# Altium PCB PCB1.PcbDoc (part 3 of 3)
Units mm, origin at the board's own origin, x right, y up, seen from the top; angles counter-clockwise.
Board outline 130 x 100 mm, 2 copper layers (Top Layer, Bottom Layer), stack 1.571 mm thick; 286 components, 215 nets, 1030 pads, 857 vias.
Unrouted connection lines stored in the file: 4.
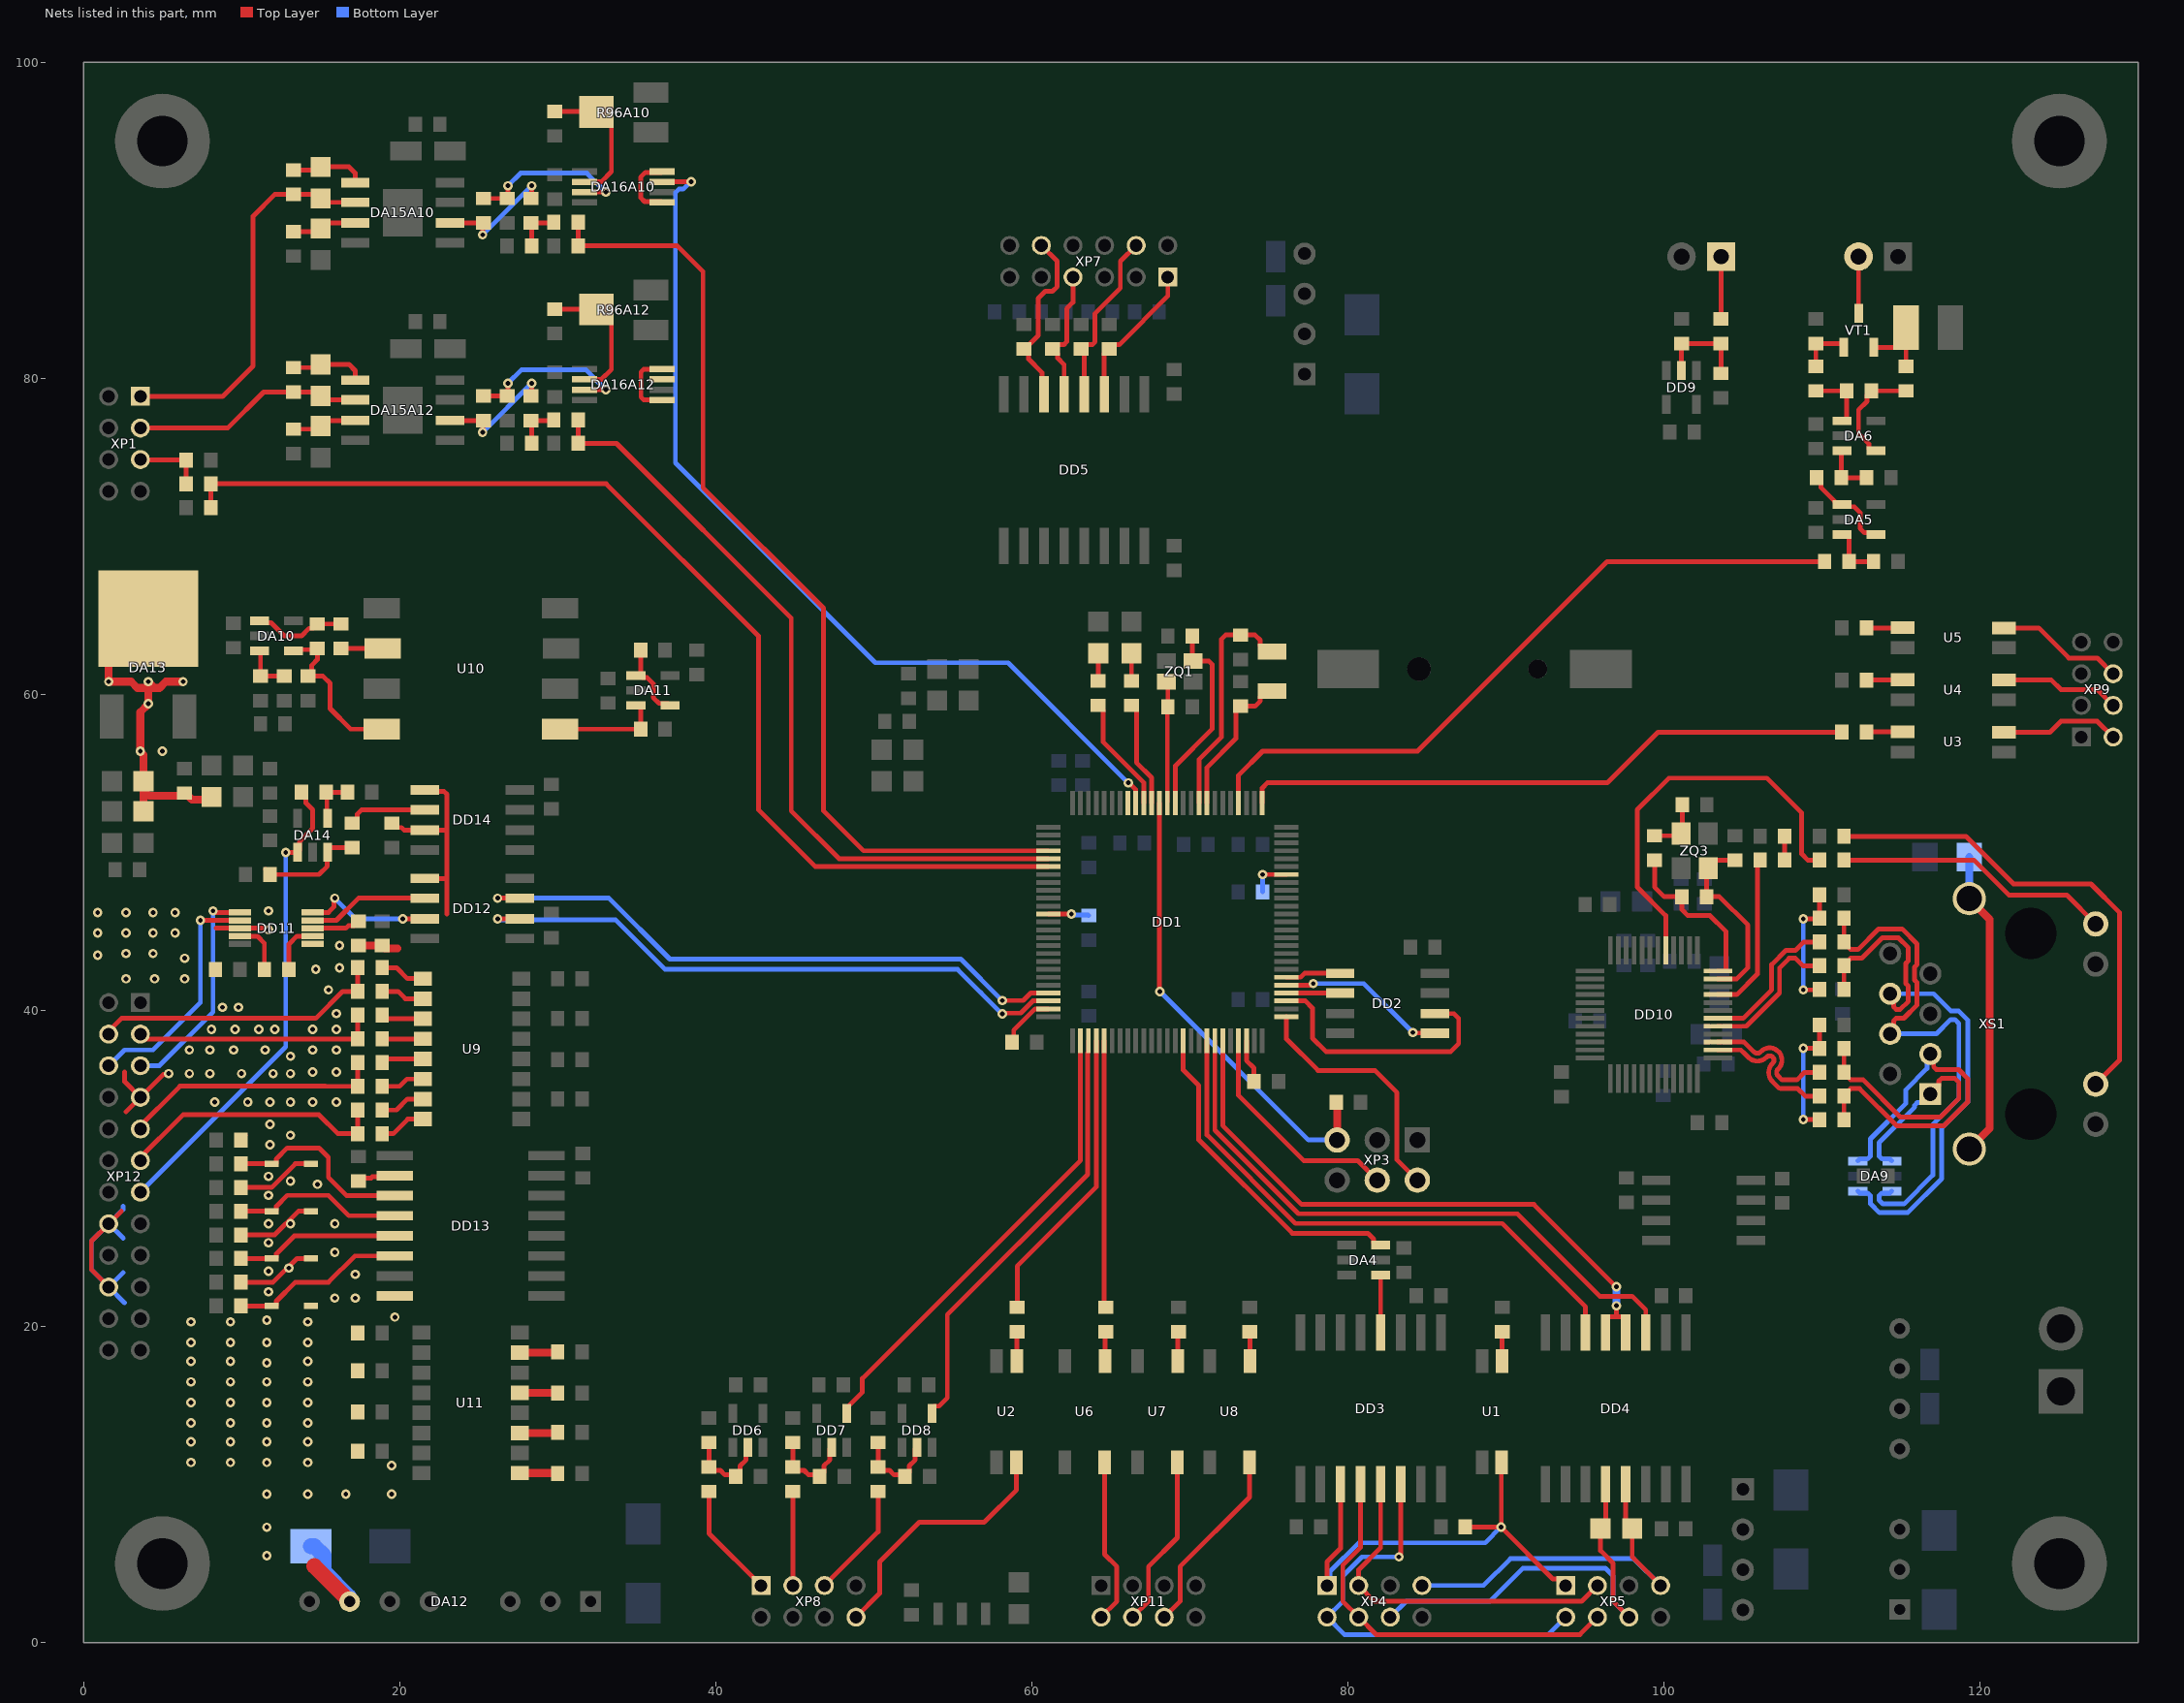
[diagram p3: the nets of this part, all layers, seen from the top]

## Via types
v1: diameter 0.6, hole 0.3, Top Layer to Bottom Layer, tented both sides, 832 vias
v2: diameter 0.6, hole 0.3, Top Layer to Bottom Layer, 25 vias

## Nets (pads, with @x,y where several pads share a name; then routed paths per layer and width w, separated by ;. In a path a pad name is that pad's centre, name@x,y a point inside that pad or via, vN(x,y) a via of type N, cw(c..) or ccw(c..) an arc to the next point about the centre after c; other vN are vias at no path point) (continued)
GND_HW: C69.2 C70.2 C74.2 C75.2 C82.1 C83.2 C84.2 C85.2 DA12.7 DA13.2 DD11.1 DD11.8 DD12.5 DD13.2 DD13.8 DD14.5 DD14.7 R51.1 R52.1 R54.1 R55.1 R57.1 R58.1 R59.1 R61.1 R83.1 R85.1 R86.1 R87.1 R89.1 R90.1 U9.2 U9.4 U9.6 U9.8 VD3.2 VD4.2 VD5.2 VD6.2 XP12.7 XP12.16 XP12.20 | length 103
  Top Layer w0.3: XP12.20@1.6,22.5 0.5,23.6 0.5,25.4 XP12.16@1.6,26.5 2.4,27.3 ; 2.6,36.1 2.6,35.5 XP12.7@3.6,34.5 ; 2.7,33.6 XP12.7@3.6,34.5 ; v1(5.4,36) 5.343,35.943 5.043,35.943 XP12.7@3.6,34.5 ; 8.4,45.2 DD11.8@9.9,45.2 11.519,45.2 11.619,45.1 v1(11.7,45.1) ; R61.1@9.95,22.8 12,22.8 13.5,24.3 VD4.2@14.4,24.3 ; R58.1@9.95,25.8 12.1,25.8 13.6,27.3 VD5.2@14.4,27.3 ; R55.1@9.95,28.8 11.9,28.8 13.4,30.3 VD6.2@14.4,30.3 ; R52.1@9.95,31.8 9.95,31.825 R52.1@10.225,32.1 ; C75.2@17.4,29.2 17.6,29.4 18.2,29.4 18.282,29.482 19.632,29.482 DD13.2@19.7,29.55 ; R59.1@18.9,32.2 19.6,32.2 20.52,33.12 U9.8@21.48,33.12 ; R57.1@18.9,35.2 20,35.2 20.46,35.66 U9.6@21.48,35.66 ; R54.1@18.9,38.2 U9.4@21.48,38.2 ; R51.1@18.9,41.2 19.9,41.2 20.36,40.74 U9.2@21.48,40.74 ; C83.2@19.5,51.85 19.775,51.575 20.125,51.575 20.3,51.4 DD14.7@21.6,51.4 23,51.4 ; DD12.5@21.6,48.35 23,48.35 ; DD14.5@21.6,53.95 21.7,53.85 22.824,53.85 23,53.674 23,51.4 ; 23,46.1 23,48.35 ; 23,48.35 23,51.4
  Top Layer w0.5: R85.1@3.8,52.6 C82.1@3.8,53.898 ; DA13.2@4.1,64.8 1.6,62.3 v1(1.6,60.8) 3.014,60.8 3.414,60.4 4.1,60.4 ; v1(6.3,60.8) 5.2,60.8 4.8,60.4 4.5,60.4 ; R83.1@8.1,53.5 7.94,53.34 6.86,53.34 6.45,53.75 C84.2@6.4,53.75 6.24,53.59 4.161,53.59 4.146,53.605 4.093,53.605 C82.1@3.8,53.898 ; C70.2@17.401,44.1 C74.2@18.9,44.1 ; C74.2@18.9,44.1 19.075,43.925 19.875,43.925 ; C82.1@3.8,53.898 C82.1@3.8,54.5 3.8,56.173 3.6,56.373 v1(3.6,56.4) 3.6,58.873 4.1,59.373 v1(4.1,59.4) 4.1,60.4 ; 4.1,60.4 4.5,60.4 ; 4.1,60.4 v1(4.1,60.8) 4.5,60.4
  Top Layer w1: 14.6,4.84 DA12.7@16.84,2.6
  Bottom Layer w0.3: 2.5,23.4 XP12.20@1.6,22.5 ; 2.5,27.6 2.5,27.4 XP12.16@1.6,26.5 ; 2.514,25.586 XP12.16@1.6,26.5 ; 2.6,21.5 XP12.20@1.6,22.5 ; XP12.20@1.6,22.5 0.5,23.6 0.5,25.4 XP12.16@1.6,26.5
  Bottom Layer w1: C85.2@14.4,6.1 14.6,6.1 15.2,5.5 15.2,4.5 16.783,2.917 16.783,2.657 DA12.7@16.84,2.6
  other v1: 11.6,5.5 11.6,7.3 11.6,9.4 14.2,9.4 16.6,9.4 19.5,9.4 19.5,11.2 6.8,11.4 9.3,11.4 11.6,11.4 14.2,11.4 6.8,12.7 9.3,12.7 11.6,12.7 14.2,12.7 6.8,13.9 9.3,13.9 11.6,13.9 14.2,13.9 6.8,15.2 9.3,15.2 11.6,15.2 14.2,15.2 6.8,16.5 9.3,16.5 11.6,16.5 14.2,16.5 11.6,17.7 6.8,17.8 9.3,17.8 14.2,17.8 6.8,19 9.3,19 11.6,19 14.2,19 6.8,20.3 9.3,20.3 14.2,20.3 11.6,20.4 19.7,20.6 15.9,21.8 17.2,21.8 11.7,22.2 17.2,23.3 11.7,23.5 13,23.7 15.9,24.7 11.7,25.3 11.7,26.5 13.1,26.5 15.9,26.5 11.7,28.3 14.8,29 13.1,29.2 11.7,29.5 11.8,31.5 13.1,32.1 11.8,32.8 8.3,34.2 10.4,34.2 11.8,34.2 13.1,34.2 14.5,34.2 16,34.2 6.7,36 8,36 10,36 12,36 13.1,36 14.5,36.1 16,36.1 13.1,37.1 6.7,37.5 8,37.5 9.5,37.5 11.5,37.5 14.5,37.5 16,37.5 8.1,38.8 9.6,38.8 11.1,38.8 12.1,38.8 14.5,38.8 16,38.8 16,39.8 8.8,40.2 9.8,40.2 15.5,41.3 2.7,42 4.5,42 6.4,42 14.7,42.6 16.2,42.7 6.4,43.3 0.9,43.5 2.7,43.6 4.4,43.6 16.2,44.1 0.9,44.9 2.7,44.9 4.4,44.9 5.8,44.9 0.9,46.2 2.7,46.2 4.4,46.2 5.8,46.2 11.7,46.3 5,56.4
GUIDE_LAS: DD1.4 R10.1 | length 44.4
  Top Layer w0.3: DD1.4@73.075,53.125 73.075,54.875 74.6,56.4 84.4,56.4 96.4,68.4 R10.1@110.15,68.4
IL1_HW: R51.2 R64.1 XP12.4 | length 18.6
  Top Layer w0.3: XP12.4@1.4,38.5 2.4,39.5 14.7,39.5 16.4,41.2 R51.2@17.35,41.2 R64.1@17.35,42.7
IL2_HW: R54.2 R65.1 XP12.3 | length 15.6
  Top Layer w0.3: XP12.3@3.4,38.5 3.644,38.5 3.944,38.2 R54.2@17.35,38.2 R65.1@17.35,39.7
KEY: DD1.52 DD7.4 | length 29.7
  Top Layer w0.3: DD7.4@48.275,14.515 48.275,14.84 49.275,15.84 49.275,16.715 63.075,30.515 DD1.52@63.075,38.075
KEY_HW: R57.2 R66.1 XP12.9 | length 16.6
  Top Layer w0.3: XP12.9@3.4,32.5 6.107,35.207 15.307,35.207 15.313,35.2 R57.2@17.35,35.2 R66.1@17.35,36.7
LED1: DD1.15 R5.1 | length 6.7
  Top Layer w0.3: R5.1@66.3,59.3 66.343,59.3 66.618,59.025 66.618,55.682 67.575,54.725 DD1.15@67.575,53.125
LED2: DD1.16 R6.1 | length 7.4
  Top Layer w0.3: R6.1@64.2,59.3 64.243,59.3 64.518,59.025 64.518,56.982 67.075,54.425 DD1.16@67.075,53.125
LNKn: DD10.17 R45.2 | length 25.7
  Top Layer w0.3: DD10.17@100.1,43.8 100.1,46 98.3,47.8 98.3,52.7 100.3,54.7 106.5,54.7 108.7,52.5 108.7,49.9 109.088,49.512 R45.2@109.825,49.512
MEM_CS: DD1.81 DD2.1 | length 3.5
  Top Layer w0.3: DD1.81@76.1,42.1 77,42.1 77.25,42.35 DD2.1@79.5,42.35
MEM_MISO: DD1.79 DD2.2 | length 4
  Top Layer w0.3: DD1.79@75.5,41.1 DD2.2@79.5,41.1
MEM_MOSI: DD1.80 DD2.5 | length 11.2
  Top Layer w0.3: DD1.80@75.5,41.6 DD1.80@76.1,41.6 77.619,41.6 77.719,41.7 v1(77.8,41.7) ; v1(84.1,38.6) 84.125,38.575 85.375,38.575 DD2.5@85.4,38.6
  Bottom Layer w0.3: v1(77.8,41.7) 81,41.7 v1(84.1,38.6)
MEM_SCLK: DD1.78 DD2.6 | length 16.8
  Top Layer w0.3: DD1.78@76.1,40.6 77.3,40.6 77.75,40.15 77.75,38.25 78.6,37.4 86.5,37.4 87,37.9 87,39.5 86.7,39.8 DD2.6@85.5,39.8
MP_EN_HW: R59.2 R67.1 XP12.11 | length 17.1
  Top Layer w0.3: XP12.11@3.4,30.5 6.3,33.4 14.9,33.4 16.1,32.2 R59.2@17.35,32.2 R67.1@17.35,33.7
NetC12_1: C12.1 DD1.49 | length 3.6
  Top Layer w0.3: C12.1@58.75,38 58.85,38.1 58.85,38.749 60.201,40.1 DD1.49@61.05,40.1
NetC14_1: C14.1 DD1.73 | length 2.8
  Top Layer w0.3: DD1.73@73.575,38.075 73.575,36.825 74.05,36.35 C14.1@74.05,35.5
NetC30_1: C30.1 DA5.3 R10.2 | length 3.6
  Top Layer w0.3: DA5.3@111.25,70.1 111.575,70.1 111.7,69.975 111.7,69.35 R10.2@111.7,68.4 C30.1@113.25,68.4
NetC33_1: C33.1 DA6.1 R13.1 | length 4.1
  Top Layer w0.3: R13.1@109.6,79.2 C33.1@111.55,79.2 111.55,77.425 111.425,77.3 DA6.1@111.25,77.3
NetC33_2: C33.2 DA6.4 R14.1 | length 7
  Top Layer w0.3: DA6.4@113.4,75.4 113.075,75.4 112.95,75.525 112.95,75.85 112.3,76.5 112.3,78 112.832,78.532 112.832,78.932 C33.2@113.1,79.2 R14.1@115.3,79.2
NetC44_1: C44.1 DD6.2 R21.2 R24.1 | length 5.7
  Top Layer w0.3: R24.1@39.575,12.665 R21.2@39.575,11.115 39.793,10.897 40.293,10.897 40.576,10.614 41.176,10.614 C44.1@41.275,10.515 41.543,10.783 41.543,11.183 41.919,11.559 41.919,12.259 DD6.2@42.025,12.365
NetC45_1: C45.1 DD7.2 R22.2 R25.1 | length 5.7
  Top Layer w0.3: R25.1@44.875,12.665 R22.2@44.875,11.115 45.093,10.897 45.593,10.897 45.876,10.614 46.476,10.614 C45.1@46.575,10.515 46.843,10.783 46.843,11.183 47.219,11.559 47.219,12.259 DD7.2@47.325,12.365
NetC46_1: C46.1 DD8.2 R23.2 R26.1 | length 5.7
  Top Layer w0.3: R26.1@50.275,12.665 R23.2@50.275,11.115 50.493,10.897 50.993,10.897 51.276,10.614 51.876,10.614 C46.1@51.975,10.515 52.243,10.783 52.243,11.183 52.619,11.559 52.619,12.259 DD8.2@52.725,12.365
NetC50_1: C50.1 DD9.2 R31.2 R32.1 | length 6.1
  Top Layer w0.3: DD9.2@101.1,80.5 C50.1@101.1,82.2 R31.2@103.6,82.2 R32.1@103.6,80.3
NetC53_1: C53.1 XS1.13 XS1.14 | length 19.5
  Top Layer w0.5: XS1.13@119.3,31.232 120.6,32.532 120.6,45.772 XS1.14@119.3,47.072
  Bottom Layer w0.5: XS1.14@119.3,47.072 C53.1@119.3,49.7
NetC55_1: C55.1 R36.2 R37.2 | length 8.1
  Top Layer w0.3: v1(108.8,33.1) 109.803,33.1 R36.2@109.825,33.078 ; v1(108.8,37.6) 109.803,37.6 R37.2@109.825,37.578 C55.1@109.825,39.078
  Bottom Layer w0.3: v1(108.8,33.1) v1(108.8,37.6)
NetC56_1: C56.1 R38.2 R39.2 | length 8.1
  Top Layer w0.3: v1(108.8,41.3) 109.8,41.3 R38.2@109.825,41.325 ; v1(108.8,45.8) 109.8,45.8 R39.2@109.825,45.825 C56.1@109.825,47.325
  Bottom Layer w0.3: v1(108.8,41.3) v1(108.8,45.8)
NetC60_1: C60.1 R49.2 ZQ3.3 | length 3.6
  Top Layer w0.3: R49.2@99.4,51.05 100.925,51.05 ZQ3.3@101.075,51.2 101.15,51.275 C60.1@101.15,53
NetC70_1: C70.1 DD11.3 | length 3.1
  Top Layer w0.3: DD11.3@14.5,45.2 16.6,45.2 16.776,45.376 17.126,45.376 C70.1@17.401,45.651
NetC72_1: C72.1 DD11.9 | length 3.4
  Top Layer w0.3: DD11.9@9.9,44.7 11,44.7 11.45,44.25 C72.1@11.45,42.6
NetC72_2: C72.2 DD11.2 | length 3.3
  Top Layer w0.3: C72.2@13,42.6 13,44.2 13.5,44.7 DD11.2@14.5,44.7
NetC73_1: C73.1 DA10.1 R70.1 | length 5.9
  Top Layer w0.3: DA10.1@11.15,64.65 11.275,64.525 11.875,64.525 12.7,63.7 13.8,63.7 14.275,64.175 14.525,64.175 C73.1@14.8,64.45 R70.1@16.3,64.45
NetC73_2: C73.2 DA10.4 R72.1 U10.4 | length 10.6
  Top Layer w0.3: DA10.4@13.3,62.75 13.375,62.825 14.725,62.825 C73.2@14.8,62.9 14.8,62.2 14.443,61.843 14.443,61.393 R72.1@14.2,61.15 15.15,61.15 15.6,60.7 15.6,59.1 16.9,57.8 U10.4@18.875,57.8
NetC86_1: C86.1 DA14.3 R82.2 | length 6.9
  Top Layer w0.3: C86.1@11.525,48.925 11.8,48.65 C86.1@11.8,48.6 14.9,48.6 15.426,49.126 15.426,50.151 15.575,50.3 R82.2@17,50.3
NetC90A10_2: C90A10.2 DA15A10.3 R91A10.1 | length 3.4
  Top Layer w0.3: C90A10.2@13.3,89.275 R91A10.1@14.8,89.275 ; R91A10.1@15.35,89.825 DA15A10.3@17.2,89.825
NetC90A12_2: C90A12.2 DA15A12.3 R91A12.1 | length 4.1
  Top Layer w0.3: C90A12.2@13.3,76.775 14.8,76.775 R91A12.1@15,76.975 15.35,77.325 DA15A12.3@17.2,77.325
NetC91A10_1: C91A10.1 DA15A10.1 R92A10.1 | length 4.5
  Top Layer w0.3: C91A10.1@13.3,93.175 R92A10.1@14.8,93.175 ; R92A10.1@15,93.375 16.8,93.375 17.2,92.975 DA15A10.1@17.2,92.375
NetC91A12_1: C91A12.1 DA15A12.1 R92A12.1 | length 4.7
  Top Layer w0.3: C91A12.1@13.3,80.675 14.8,80.675 R92A12.1@15,80.875 16.8,80.875 17.2,80.475 DA15A12.1@17.2,79.875
NetC94A10_1: C94A10.1 DA16A10.3 R93A10.2 | length 10.7
  Top Layer w0.3: R93A10.2@25.3,91.375 C94A10.1@26.8,91.375 26.85,91.425 v1(26.85,92.175) ; DA16A10.3@31.7,91.775 v1(33.05,91.775)
  Bottom Layer w0.3: v1(26.85,92.175) 27.65,92.975 31.85,92.975 v1(33.05,91.775)
NetC94A12_1: C94A12.1 DA16A12.3 R93A12.2 | length 10.7
  Top Layer w0.3: R93A12.2@25.3,78.875 C94A12.1@26.8,78.875 26.85,78.925 v1(26.85,79.675) ; DA16A12.3@31.7,79.275 v1(33.05,79.275)
  Bottom Layer w0.3: v1(26.85,79.675) 27.7,80.525 31.8,80.525 v1(33.05,79.275)
NetDA4_4: DA4.4 DD3.4 | length 3.7
  Top Layer w0.3: DD3.4@82.065,19.615 82.065,23.125 82.19,23.25 DA4.4@82.25,23.25
NetDA5_1: DA5.1 DA5.4 R11.1 | length 6.1
  Top Layer w0.3: R11.1@109.65,73.7 109.925,73.425 109.925,73.075 110.8,72.2 110.8,72.125 110.925,72 DA5.1@111.25,72 111.375,71.875 112.025,71.875 112.4,71.5 112.4,70.5 112.675,70.225 113.275,70.225 DA5.4@113.4,70.1
NetDA6_3: DA6.3 R11.2 R12.1 | length 3.3
  Top Layer w0.3: R11.2@111.183,73.7 R12.1@112.783,73.7 ; R11.2@111.2,73.7 111.2,75.35 DA6.3@111.25,75.4
NetDA10_3: DA10.3 R56.2 R60.1 | length 3.1
  Top Layer w0.3: DA10.3@11.15,62.75 11.2,62.7 R56.2@11.2,61.15 R60.1@12.7,61.15
NetDA11_1: DA11.1 DA11.4 R77.1 | length 5
  Top Layer w0.3: DA11.1@34.95,61.2 DA11.1@35.275,61.2 ; DA11.1@35.25,61.2 35.375,61.075 35.65,61.075 36.046,60.68 36.046,59.798 36.419,59.425 36.975,59.425 DA11.4@37.1,59.3 ; DA11.1@35.25,61.325 R77.1@35.25,62.8
NetDA11_3: DA11.3 R76.1 U10.5 | length 6.8
  Top Layer w0.3: U10.5@30.15,57.8 R76.1@35.25,57.8 35.25,59.175 35.125,59.3 DA11.3@34.95,59.3
NetDA14_4: DA14.4 R84.2 R88.1 | length 3
  Top Layer w0.3: DA14.4@15.45,52.15 15.4,52.2 15.4,53.75 R88.1@15.35,53.8 R84.2@16.7,53.8
NetDA15A10_6: DA15A10.6 R93A10.1 R94A10.1 | length 8.1
  Top Layer w0.3: DA15A10.6@23.2,89.825 R93A10.1@25.3,89.825 25.25,89.775 v1(25.25,89.075) ; R94A10.1@28.3,91.375 28.35,91.425 v1(28.35,92.175)
  Bottom Layer w0.3: v1(25.25,89.075) v1(28.35,92.175)
NetDA15A12_6: DA15A12.6 R93A12.1 R94A12.1 | length 8.1
  Top Layer w0.3: DA15A12.6@23.2,77.325 R93A12.1@25.3,77.325 25.25,77.275 v1(25.25,76.575) ; R94A12.1@28.3,78.875 28.35,78.925 v1(28.35,79.675)
  Bottom Layer w0.3: v1(25.25,76.575) v1(28.35,79.675)
NetDA16A10_2: DA16A10.2 R95A10.2 R96A10.2 | length 8.9
  Top Layer w0.3: R95A10.2@29.8,96.875 32.425,96.875 R96A10.2@32.45,96.85 32.55,96.85 33.4,96 33.4,93.075 32.75,92.425 DA16A10.2@31.7,92.425
NetDA16A10_5: DA16A10.5 DA16A10.8 | length 4.3
  Top Layer w0.3: DA16A10.5@36.6,91.125 36.55,91.175 35.5,91.175 35.249,91.426 35.249,92.724 35.55,93.025 36.55,93.025 DA16A10.8@36.6,93.075
NetDA16A12_2: DA16A12.2 R95A12.2 R96A12.2 | length 8.9
  Top Layer w0.3: R95A12.2@29.8,84.375 32.425,84.375 R96A12.2@32.45,84.35 32.55,84.35 33.4,83.5 33.4,80.55 32.775,79.925 DA16A12.2@31.7,79.925
NetDA16A12_5: DA16A12.5 DA16A12.8 | length 4.4
  Top Layer w0.3: DA16A12.5@36.6,78.625 35.451,78.625 35.275,78.801 35.275,80.399 35.451,80.575 DA16A12.8@36.6,80.575
NetDD1_37: DD1.37 R3.1 | length 2.6
  Top Layer w0.3: DD1.37@61.05,46.1 v1(62.5,46.1)
  Bottom Layer w0.3: v1(62.5,46.1) 62.55,46.05 63.55,46.05 R3.1@63.6,46
NetDD1_94: DD1.94 R4.1 | length 2.6
  Top Layer w0.3: v1(74.6,48.6) DD1.94@76.1,48.6
  Bottom Layer w0.3: R4.1@74.6,47.5 v1(74.6,48.6)
NetDD3_11: DD3.11 R7.2 U1.4 XP4.1 XP5.1 | length 31.7
  Top Layer w0.3: XP4.1@78.675,3.615 78.675,5.115 79.525,5.965 DD3.11@79.525,10.015 ; R7.2@87.5,7.14 87.675,7.315 v1(89.675,7.315) ; U1.4@89.725,11.415 89.7,11.39 89.7,7.34 v1(89.675,7.315) ; XP5.1@93.775,3.615 93.357,4.033 92.957,4.033 v1(89.675,7.315)
  Bottom Layer w0.3: XP4.1@78.675,3.615 78.849,3.789 78.849,4.489 80.675,6.315 88.675,6.315 v1(89.675,7.315)
NetDD3_12: DD3.12 XP4.4 XP5.4 | length 25.3
  Top Layer w0.3: DD3.12@80.795,10.015 80.795,6.035 79.675,4.915 79.675,2.615 XP4.4@80.675,1.615 81.775,0.515 94.675,0.515 XP5.4@95.775,1.615
NetDD3_13: DD3.13 XP4.3 XP5.3 | length 22.9
  Top Layer w0.3: DD3.13@82.065,10.015 82.065,6.005 80.675,4.615 XP4.3@80.675,3.615 81.675,2.615 94.775,2.615 XP5.3@95.775,3.615
NetDD3_14: DD3.14 XP4.2 XP5.2 | length 27.7
  Top Layer w0.3: v1(83.225,5.425) 83.225,5.507 83.335,5.617 DD3.14@83.335,10.015
  Bottom Layer w0.3: v1(83.225,5.425) 80.885,5.425 79.675,4.215 79.675,2.615 XP4.2@78.675,1.615 79.775,0.515 92.675,0.515 XP5.2@93.775,1.615
NetDD4_12: DD4.12 R8.1 XP4.6 XP5.6 | length 27.9
  Top Layer w0.3: DD4.12@96.295,10.015 96.295,7.535 R8.1@95.975,7.215 95.975,5.815 96.775,5.015 96.775,2.615 XP5.6@97.775,1.615
  Bottom Layer w0.3: XP4.6@82.675,1.615 83.675,2.615 88.975,2.615 91.075,4.715 96.275,4.715 96.775,4.215 96.775,2.615 XP5.6@97.775,1.615
NetDD4_13: DD4.13 R8.2 XP4.7 XP5.7 | length 23.8
  Top Layer w0.3: DD4.13@97.565,10.015 97.565,7.625 R8.2@97.975,7.215 97.975,5.415 XP5.7@99.775,3.615
  Bottom Layer w0.3: XP4.7@84.675,3.615 88.575,3.615 90.275,5.315 98.075,5.315 XP5.7@99.775,3.615
NetDD5_3: DD5.3 R20.1 XP7.1 | length 9.3
  Top Layer w0.3: DD5.3@64.58,79 64.58,81.575 64.855,81.85 R20.1@64.9,81.85 65.175,82.125 65.525,82.125 68.6,85.2 XP7.1@68.6,86.4
NetDD5_4: DD5.4 R19.1 XP7.4 | length 11.2
  Top Layer w0.3: DD5.4@63.31,79 63.31,81.64 R19.1@63.1,81.85 63.375,82.125 63.824,82.125 64,82.301 64,84.1 65.6,85.7 65.6,87.4 XP7.4@66.6,88.4
NetDD5_5: DD5.5 R18.1 XP7.7 | length 8.5
  Top Layer w0.3: DD5.5@62.04,79 62.04,80.86 61.625,81.275 61.625,81.575 61.35,81.85 R18.1@61.3,81.85 61.575,82.125 62.024,82.125 62.2,82.301 62.2,84.4 62.6,84.8 XP7.7@62.6,86.4
NetDD5_6: DD5.6 R17.1 XP7.10 | length 11.5
  Top Layer w0.3: R17.1@59.5,81.85 R17.1@59.518,81.85 ; XP7.10@60.6,88.4 61.6,87.4 61.6,85.8 61.3,85.5 60.851,85.5 60.4,85.049 60.4,82.7 59.55,81.85 R17.1@59.518,81.85 ; DD5.6@60.77,79 60.642,79.128 60.642,80.358 59.793,81.207 59.793,81.575 R17.1@59.518,81.85
NetDD10_9: DD10.9 R48.2 | length 10.3
  Top Layer w0.3: DD10.9@103.4,41 104.6,41 105.9,42.3 105.9,49.337 R48.2@106.075,49.512
NetDD11_4: DD11.4 DD12.6 | length 7.7
  Top Layer w0.3: DD11.4@14.5,45.7 16,45.7 17.4,47.1 DD12.6@21.6,47.1
NetDD11_5: DD11.5 DD12.7 | length 8.3
  Top Layer w0.3: DD11.5@14.5,46.2 15.5,46.2 15.843,46.543 15.843,47.043 v1(15.9,47.1) ; v1(20.2,45.8) DD12.7@21.6,45.8
  Bottom Layer w0.3: v1(15.9,47.1) 17.2,45.8 v1(20.2,45.8)
NetDD13_3: DD13.3 R68.2 VD6.1 | length 12.3
  Top Layer w0.3: R68.2@9.95,30.3 VD6.1@11.9,30.3 12.15,30.3 12.2,30.35 12.2,30.6 12.9,31.3 14.9,31.3 15.494,30.706 15.494,29.438 16.652,28.28 DD13.3@19.7,28.28
NetDD13_4: DD13.4 R62.2 VD5.1 | length 10.8
  Top Layer w0.3: R62.2@9.95,27.3 VD5.1@11.9,27.3 12.15,27.3 12.2,27.35 12.2,27.6 12.9,28.3 15.5,28.3 16.79,27.01 DD13.4@19.7,27.01
NetDD13_5: DD13.5 R69.2 VD4.1 | length 10.5
  Top Layer w0.3: R69.2@9.95,24.3 VD4.1@11.9,24.3 12.15,24.3 12.2,24.35 12.2,24.6 13.34,25.74 DD13.5@19.7,25.74
NetDD13_6: DD13.6 R63.2 VD3.1 | length 11.2
  Top Layer w0.3: R63.2@9.95,21.3 VD3.1@11.9,21.3 12.15,21.3 12.2,21.35 12.2,21.6 13.4,22.8 15.5,22.8 17.17,24.47 DD13.6@19.7,24.47
NetDD14_6: DD14.6 R82.1 | length 5.1
  Top Layer w0.3: R82.1@17,51.85 17.05,51.85 17.325,52.125 17.325,52.425 17.6,52.7 DD14.6@21.6,52.7
NetR5_2: R5.2 VD1.1 | length 1.8
  Top Layer w0.3: R5.2@66.3,60.85 VD1.1@66.3,62.6
NetR6_2: R6.2 VD2.1 | length 1.8
  Top Layer w0.3: R6.2@64.2,60.85 VD2.1@64.2,62.6
NetR9_2: R9.2 U1.1 | length 1.9
  Top Layer w0.3: U1.1@89.75,17.815 89.75,19.64 R9.2@89.775,19.665
NetR13_2: R13.2 R15.2 VT1.1 | length 3.4
  Top Layer w0.3: R13.2@109.6,80.75 R15.2@109.6,82.2 111.225,82.2 111.35,82.075 VT1.1@111.35,81.95
NetR14_2: R14.2 R16.2 VT1.2 | length 4.8
  Top Layer w0.3: VT1.2@113.25,81.95 114.65,81.95 R16.2@115.3,82.6 ; R14.2@115.3,80.75 R16.2@115.3,83.2
NetR21_1: R21.1 XP8.1 | length 7.3
  Top Layer w0.3: R21.1@39.575,9.565 39.575,6.915 XP8.1@42.875,3.615
NetR22_1: R22.1 XP8.3 | length 5.9
  Top Layer w0.3: XP8.3@44.875,3.615 R22.1@44.875,9.565
NetR23_1: R23.1 XP8.5 | length 7.4
  Top Layer w0.3: XP8.5@46.875,3.615 50.275,7.015 R23.1@50.275,9.565
NetR27_1: R27.1 U2.1 | length 1.9
  Top Layer w0.3: U2.1@59.05,17.815 59.05,19.64 R27.1@59.075,19.665
NetR28_1: R28.1 U3.1 | length 2.6
  Top Layer w0.3: R28.1@112.55,57.6 112.575,57.625 U3.1@115.1,57.625
NetR29_1: R29.1 U4.1 | length 2.3
  Top Layer w0.3: R29.1@112.8,60.9 115.075,60.9 U4.1@115.1,60.925
NetR30_1: R30.1 U5.1 | length 2.3
  Top Layer w0.3: R30.1@112.8,64.2 115.075,64.2 U5.1@115.1,64.225
NetR31_1: R31.1 XP10.1 | length 3.9
  Top Layer w0.3: R31.1@103.6,83.75 XP10.1@103.6,87.7
NetR33_1: R33.1 U6.1 | length 1.9
  Top Layer w0.3: U6.1@64.625,17.815 64.625,19.615 R33.1@64.675,19.665
NetR34_1: R34.1 U7.1 | length 1.9
  Top Layer w0.3: U7.1@69.225,17.815 69.225,19.615 R34.1@69.275,19.665
NetR35_1: R35.1 U8.1 | length 1.9
  Top Layer w0.3: R35.1@73.775,19.665 73.8,19.64 U8.1@73.8,17.815
NetR42_1: R42.1 XS1.10 | length 30.9
  Top Layer w0.3: R42.1@111.375,51.012 119.088,51.012 122.1,48 127,48 128.8,46.2 128.8,36.84 XS1.10@127.3,35.339
NetR45_1: R45.1 XS1.12 | length 17.6
  Top Layer w0.3: R45.1@111.375,49.512 119.588,49.512 121.8,47.3 125.469,47.3 XS1.12@127.3,45.469
NetR46_2: R46.2 R48.1 | length 1.5
  Top Layer w0.3: R48.1@107.625,49.512 R46.2@107.625,51.012
NetR64_2: R64.2 U9.1 | length 2.9
  Top Layer w0.3: R64.2@18.9,42.7 19.8,42.7 20.49,42.01 U9.1@21.48,42.01
NetR65_2: R65.2 U9.3 | length 2.7
  Top Layer w0.3: R65.2@18.9,39.7 19.13,39.47 U9.3@21.48,39.47
NetR66_2: R66.2 U9.5 | length 2.7
  Top Layer w0.3: R66.2@18.9,36.7 19.13,36.93 U9.5@21.48,36.93
NetR67_2: R67.2 U9.7 | length 2.9
  Top Layer w0.3: R67.2@18.9,33.7 19.8,33.7 20.49,34.39 U9.7@21.48,34.39
NetR70_2: R70.2 U10.2 | length 2.6
  Top Layer w0.3: R70.2@16.3,62.9 U10.2@18.925,62.9
NetR78_1: R78.1 U11.1 | length 2
  Top Layer w0.3: 29.57,10.73 R78.1@29.6,10.7
  Top Layer w0.5: U11.1@27.6,10.73 29.57,10.73
NetR79_1: R79.1 U11.3 | length 2
  Top Layer w0.3: 29.57,13.27 R79.1@29.6,13.3
  Top Layer w0.5: U11.3@27.6,13.27 29.57,13.27
NetR80_1: R80.1 U11.5 | length 2
  Top Layer w0.5: U11.5@27.6,15.81 29.59,15.81 R80.1@29.6,15.8
NetR81_1: R81.1 U11.7 | length 2
  Top Layer w0.3: 29.55,18.35 R81.1@29.6,18.4
  Top Layer w0.5: U11.7@27.6,18.35 29.55,18.35
NetR94A10_2: R94A10.2 R97A10.1 R98A10.1 | length 2.9
  Top Layer w0.3: R97A10.1@28.35,88.375 28.35,89.775 R94A10.2@28.3,89.825 29.7,89.825 R98A10.1@29.75,89.875
NetR94A12_2: R94A12.2 R97A12.1 R98A12.1 | length 2.9
  Top Layer w0.3: R97A12.1@28.35,75.875 28.35,77.275 R94A12.2@28.3,77.325 29.7,77.325 R98A12.1@29.75,77.375
NetU2_4: U2.4 XP8.8 | length 16.4
  Top Layer w0.3: XP8.8@48.875,1.615 50.375,3.115 50.375,5.115 52.875,7.615 56.975,7.615 59.025,9.665 U2.4@59.025,11.415
NetU3_4: U3.4 XP9.2 | length 7.6
  Top Layer w0.3: U3.4@121.5,57.6 124.4,57.6 125.1,58.3 127.4,58.3 XP9.2@128.4,57.3
NetU4_4: U4.4 XP9.4 | length 7.6
  Top Layer w0.3: U4.4@121.5,60.9 124.5,60.9 125.1,60.3 127.4,60.3 XP9.4@128.4,59.3
NetU5_4: U5.4 XP9.6 | length 8.1
  Top Layer w0.3: U5.4@121.5,64.2 123.7,64.2 125.6,62.3 127.4,62.3 XP9.6@128.4,61.3
NetU6_6: U6.6 XP11.2 | length 10.5
  Top Layer w0.3: XP11.2@64.375,1.615 65.375,2.615 65.375,4.815 64.6,5.59 U6.6@64.6,11.415
NetU7_6: U7.6 XP11.4 | length 11
  Top Layer w0.3: XP11.4@66.375,1.615 67.375,2.615 67.375,4.815 69.2,6.64 U7.6@69.2,11.415
NetU8_6: U8.6 XP11.6 | length 12
  Top Layer w0.3: XP11.6@68.375,1.615 69.375,2.615 69.375,4.815 73.775,9.215 U8.6@73.775,11.415
NetVT1_3: VT1.3 XP6.2 | length 3.6
  Top Layer w0.3: VT1.3@112.3,84.1 XP6.2@112.3,87.7
NRST: C17.1 DD1.14 XP3.5 | length 29.2
  Top Layer w0.3: DD1.14@68.075,53.125 68.075,41.225 v1(68.1,41.2)
  Top Layer w0.5: XP3.5@79.31,31.8 C17.1@79.31,33.99
  Bottom Layer w0.3: v1(68.1,41.2) 77.5,31.8 XP3.5@79.31,31.8
OSC0: C18.1 DD1.12 ZQ1.1 | length 12.6
  Top Layer w0.3: DD1.12@69.075,53.125 69.075,55.475 71.4,57.8 71.4,61.9 71.2,62.1 ZQ1.1@70.2,62.1 70.15,62.15 C18.1@70.15,63.7
OSC1: C20.1 DD1.13 ZQ1.3 | length 7.7
  Top Layer w0.3: ZQ1.3@68.5,60.8 68.6,60.7 C20.1@68.6,59.2 68.575,59.175 DD1.13@68.575,53.2
OSC32_0: C19.1 DD1.8 ZQ2.1 | length 9.6
  Top Layer w0.3: DD1.8@71.075,53.125 71.075,55.375 72.9,57.2 72.9,59 73.15,59.25 74.125,59.25 74.45,59.575 74.45,59.85 74.8,60.2 ZQ2.1@75.2,60.2
OSC32_1: C21.1 DD1.9 ZQ2.2 | length 14.9
  Top Layer w0.3: DD1.9@70.575,53.125 70.575,55.875 72,57.3 72,63.5 72.25,63.75 C21.1@73.2,63.75 74.125,63.75 74.45,63.425 74.45,63.05 74.8,62.7 ZQ2.2@75.2,62.7
PD1: C91A10.2 DA15A10.2 R92A10.2 XP1.1 | length 23.9
  Top Layer w0.3: XP1.1@3.6,78.85 8.8,78.85 10.725,80.775 10.725,90.25 12.1,91.625 C91A10.2@13.3,91.625 R92A10.2@14.75,91.625 ; R92A10.2@15.25,91.125 DA15A10.2@17.2,91.125
PD1_ADC: C95A10.1 DD1.29 R98A10.2 | length 62.6
  Top Layer w0.3: R98A10.2@31.3,89.875 C95A10.1@31.3,88.375 37.575,88.375 39.2,86.75 39.2,73.075 46.825,65.45 46.825,52.625 49.35,50.1 DD1.29@61.05,50.1
PD1_ERR: DA16A10.7 DD1.17 | length 58.8
  Top Layer w0.3: DA16A10.7@36.6,92.425 v1(38.45,92.425) ; v1(66.1,54.4) 66.149,54.4 66.575,53.974 DD1.17@66.575,53.068
  Bottom Layer w0.3: v1(38.45,92.425) 38.394,92.425 37.931,91.962 37.662,91.962 37.45,91.75 37.45,74.65 50.1,62 58.5,62 v1(66.1,54.4)
PD2: C91A12.2 DA15A12.2 R92A12.2 XP1.3 | length 14.7
  Top Layer w0.3: XP1.3@3.6,76.85 9.125,76.85 11.4,79.125 C91A12.2@13.3,79.125 14.75,79.125 R92A12.2@15,78.875 15.25,78.625 DA15A12.2@17.2,78.625
PD2_ADC: C95A12.1 DD1.30 R98A12.2 | length 49.3
  Top Layer w0.3: R98A12.2@31.3,77.375 C95A12.1@31.3,75.875 33.725,75.875 44.775,64.825 44.775,52.625 47.8,49.6 DD1.30@61.05,49.6
PD2_ERR: DA16A12.7 DD1.18
PMO_HW: DA14.1 R88.2 XP12.13 | length 30.5
  Top Layer w0.3: v1(12.8,50) DA14.1@13.55,50 13.675,50.125 13.675,50.675 14.5,51.5 14.5,52.7 14.068,53.132 14.068,53.532 R88.2@13.8,53.8
  Bottom Layer w0.3: XP12.13@3.6,28.5 12.8,37.7 v1(12.8,50)
POWER_COL: DD1.55 R33.2 | length 16.9
  Top Layer w0.3: DD1.55@64.575,38.075 64.575,21.315 R33.2@64.675,21.215
POWER_IND: DD1.1 R28.2 | length 39.1
  Top Layer w0.3: DD1.1@74.575,53.125 74.575,54.075 74.9,54.4 96.4,54.4 99.6,57.6 R28.2@111.25,57.6
RD_N: DA9.4 R38.1 R41.2 XS1.6 | length 35.6
  Top Layer w0.3: R38.1@111.375,41.325 R41.2@111.375,42.825 111.375,42.875 111.798,43.298 112.498,43.298 113.8,44.6 114.817,44.6 115.446,43.971 115.446,43.131 115.286,42.971 115.286,41.697 115.446,41.537 115.446,40.577 114.933,40.064 114.685,40.064 114.509,40.24 114.509,40.848 XS1.6@114.3,41.057
  Bottom Layer w0.3: DA9.4@112.25,28.575 112.375,28.45 112.872,28.45 113.048,28.274 113.048,27.769 113.617,27.2 115.4,27.2 117.554,29.354 117.554,32.554 119.2,34.2 119.2,39.4 118.624,39.976 118.124,39.976 117.043,41.057 XS1.6@114.3,41.057
RD_P: DA9.3 R39.1 R44.2 XS1.4 | length 34.6
  Top Layer w0.3: R39.1@111.375,45.825 R44.2@111.375,44.325 111.375,44.275 111.798,43.852 112.269,43.852 113.571,45.154 115.046,45.154 116,44.2 116,42.901 115.84,42.741 115.84,41.927 116,41.767 116,40.347 115.163,39.51 114.685,39.51 114.509,39.334 114.509,38.726 XS1.4@114.3,38.517
  Bottom Layer w0.3: XS1.4@114.3,38.517 117.217,38.517 118.122,39.422 118.394,39.422 118.646,39.171 118.646,34.429 117,32.783 117,29.583 115.171,27.754 113.846,27.754 113.602,27.998 113.602,28.274 113.778,28.45 114.275,28.45 DA9.3@114.4,28.575
RE/DE: DD1.70 DD4.4 DD4.5 | length 39.5
  Top Layer w0.3: DD1.70@72.075,38.075 72.075,32.725 77.072,27.728 91.762,27.728 v1(96.975,22.515) ; DD4.5@96.295,19.615 96.295,20.465 96.445,20.615 96.957,20.615 ; v1(96.975,21.315) 96.975,20.633 96.957,20.615 ; DD4.4@97.565,19.615 97.565,20.465 97.415,20.615 96.957,20.615
  Bottom Layer w0.5: v1(96.975,21.315) v1(96.975,22.515)
Rx232: DD1.48 DD12.2 | length 38.9
  Top Layer w0.3: v1(26.2,45.8) 27.282,45.8 DD12.2@27.382,45.7 ; v1(58.125,39.775) 58.182,39.832 59.297,39.832 60.064,40.6 DD1.48@61.05,40.6
  Bottom Layer w0.3: v1(26.2,45.8) 26.257,45.743 33.657,45.743 36.8,42.6 55.3,42.6 56.772,41.128 v1(58.125,39.775)
Rx232_HW: DD11.7 XP12.6 | length 15.2
  Top Layer w0.3: v1(7.4,45.7) DD11.7@9.9,45.7
  Bottom Layer w0.3: XP12.6@1.6,36.5 2.6,37.5 4.4,37.5 7.4,40.5 v1(7.4,45.7)
Rx485: DD1.69 DD4.3 | length 39.1
  Top Layer w0.3: DD1.69@71.575,38.075 71.575,32.425 76.867,27.133 90.717,27.133 95.935,21.915 97.975,21.915 98.835,21.055 DD4.3@98.835,19.615
RXI_N: DD10.5 R41.1 | length 9.3
  Top Layer w0.3: DD10.5@103.4,39 105.2,39 107.3,41.1 107.3,42.693 107.907,43.3 108.3,43.3 108.775,42.825 R41.1@109.825,42.825
RXI_P: DD10.6 R44.1 | length 9.4
  Top Layer w0.3: DD10.6@103.4,39.5 104.993,39.5 106.8,41.307 106.8,42.9 107.7,43.8 108.3,43.8 108.825,44.325 R44.1@109.825,44.325
SEL_MOD: DA4.6 DD1.65 | length 21.1
  Top Layer w0.3: DD1.65@69.575,38.075 69.575,36.225 70.55,35.25 70.55,31.822 76.472,25.9 81.25,25.9 81.625,25.525 81.625,25.275 81.75,25.15 DA4.6@82.075,25.15
START_BUT: DD1.53 DD8.4 | length 27.8
  Top Layer w0.3: DD8.4@53.725,14.565 53.725,14.89 53.8,14.965 54.125,14.965 54.65,15.49 54.65,20.75 63.525,29.625 63.525,37.312 63.575,37.362 DD1.53@63.575,38.075
START_IND: DD1.54 R27.2 | length 18.9
  Top Layer w0.3: R27.2@59.075,21.272 59.075,23.825 64.075,28.825 DD1.54@64.075,38.075
SWCLK: DD1.76 XP3.2 | length 15.9
  Top Layer w0.3: DD1.76@76.1,39.6 76.1,38.2 78.1,36.2 81.7,36.2 83.1,34.8 83.1,30.55 XP3.2@84.39,29.26
SWDIO: DD1.72 XP3.4 | length 14.4
  Top Layer w0.3: DD1.72@73.075,38.075 73.075,34.625 77.2,30.5 80.61,30.5 XP3.4@81.85,29.26
T1: R99.2 R100.1 XP1.5 | length 4.4
  Top Layer w0.3: XP1.5@3.6,74.85 3.625,74.825 R99.2@6.5,74.825 R100.1@6.5,73.325
T1_ADC: C97.1 DD1.31 R100.2 | length 71
  Top Layer w0.3: C97.1@8.05,71.825 R100.2@8.05,73.325 33.075,73.325 42.7,63.7 42.7,52.7 46.3,49.1 DD1.31@61.05,49.1
TD_N: DA9.6 R36.1 R40.2 XS1.3 | length 25
  Top Layer w0.3: R36.1@111.375,33.078 R40.2@111.375,34.577 111.375,34.627 111.798,35.05 112.366,35.05 114.717,32.7 117.7,32.7 119.2,34.2 119.2,35.683 118.629,36.254 117.225,36.254 117.049,36.43 117.049,37.038 XS1.3@116.84,37.247
  Bottom Layer w0.3: DA9.6@112.25,30.475 112.375,30.6 112.872,30.6 113.048,30.776 113.048,31.872 115.293,34.117 115.293,34.984 116.631,36.322 116.631,37.038 XS1.3@116.84,37.247
TD_P: DA9.1 R37.1 R43.2 XS1.1 | length 20.3
  Top Layer w0.3: R37.1@111.375,37.578 R43.2@111.375,36.078 111.375,36.028 111.798,35.604 112.596,35.604 114.946,33.254 117.471,33.254 118.646,34.429 118.646,35.454 118.4,35.7 117.547,35.7 117.371,35.524 117.371,35.238 XS1.1@116.84,34.707
  Bottom Layer w0.3: DA9.1@114.4,30.475 114.275,30.6 113.778,30.6 113.602,30.776 113.602,31.642 115.847,33.887 115.847,34 116.023,34.176 116.309,34.176 XS1.1@116.84,34.707
Tx232: DD1.47 DD12.3 | length 39
  Top Layer w0.3: v1(26.2,47.1) 27.282,47.1 DD12.3@27.382,47 ; v1(58.125,40.625) 59.45,40.625 59.925,41.1 DD1.47@61.05,41.1
  Bottom Layer w0.3: v1(26.2,47.1) 33.25,47.1 37.1,43.25 55.5,43.25 v1(58.125,40.625)
Tx232_HW: DD11.6 XP12.5 | length 14.1
  Top Layer w0.3: v1(8.2,46.3) 8.281,46.3 8.381,46.2 DD11.6@9.9,46.2
  Bottom Layer w0.3: XP12.5@3.6,36.5 4.8,36.5 8.2,39.9 v1(8.2,46.3)
Tx485: DD1.68 DD4.6 | length 36
  Top Layer w0.3: DD1.68@71.075,38.075 71.075,32.125 76.676,26.524 89.751,26.524 95.025,21.25 DD4.6@95.025,19.615
TXO_N: DD10.2 R40.1 | length 8.9
  Top Layer w0.3: DD10.2@103.4,37.5 104.855,37.5 105.046,37.309 105.329,37.026 ccw(c105.894,37.592) 106.46,37.026 106.483,37.049 cw(c106.677,36.855) 106.872,37.049 cw(c106.677,36.855) 106.872,36.66 ccw(c107.049,36.483) 106.871,36.659 106.849,36.637 ccw(c107.415,36.072) 106.849,35.506 107.277,35.077 107.341,35.077 107.368,35.05 107.772,35.05 108.449,35.05 108.923,34.577 R40.1@109.825,34.577
TXO_P: DD10.3 R43.1 | length 8.9
  Top Layer w0.3: DD10.3@103.4,38 105.062,38 105.399,37.662 105.682,37.38 ccw(c105.894,37.592) 106.106,37.38 106.131,37.404 cw(c106.677,36.855) 107.225,37.403 cw(c106.677,36.855) 107.299,36.391 107.299,36.38 107.202,36.284 ccw(c107.415,36.072) 107.202,35.859 107.457,35.604 108.326,35.604 108.404,35.604 108.878,36.078 R43.1@109.825,36.078
XSCI: DD10.12 R47.2 R49.1 | length 10.8
  Top Layer w0.3: R49.1@99.4,49.5 99.4,47.8 100,47.2 R47.2@101.125,47.2 101.125,46.375 101.5,46 102.9,46 103.9,45 103.9,42.5 DD10.12@103.4,42.5
XSCO: C58.1 DD10.11 R47.1 ZQ3.1 | length 12
  Top Layer w0.3: DD10.11@103.4,42 104.6,42 105.3,42.7 105.3,45.4 103.5,47.2 R47.1@102.675,47.2 102.675,48.875 ZQ3.1@102.8,49 102.8,49.05 103.25,49.5 C58.1@104.475,49.5
pads on no net: DA1.3 DA1.5 DA1.8 DA2.4 DA12.3 DA12.5 DA12.8 DA15A10.5 DA15A12.5 DD1.7 DD1.58 DD1.59 DD1.60 DD1.66 DD1.67 DD1.71 DD1.77 DD1.82 DD1.83 DD1.84 DD1.85 DD1.86 DD1.87 DD1.88 DD1.96 DD1.97 DD1.98 DD4.10 DD4.11 DD4.14 DD5.7 DD6.1 DD7.1 DD8.1 DD9.1 DD10.18 DD10.19 DD10.21 DD10.34 DD10.35 DD10.37 DD10.38 DD10.39 DD10.40 DD10.41 DD10.42 DD10.43 DD10.44 DD13.7 U10.7 U10.8 XP1.7 XP1.8 XP3.6 XP4.8 XP5.8 XP9.7 XP9.8 XP11.7 XP11.8 XS1. XS1.7 XS1.8

## Polygon pours and split planes (outlines as drawn)
AGND on Top Layer "AGND_L01_P007" (solid, remove dead copper, pour order 7): 0.5,90 7.375,90 10,92.625 10,99.5 43.2,99.5 43.2,72.5 53.5,62.2 53.5,56 26,56 26,68.5 23.5,71 0.5,71
GND on Top Layer "GND_L01_P003" (solid, remove dead copper, pour order 3): 120,99.5 120,92.875 122.875,90 129.5,90 129.5,66.5 119,66.5 117,64.5 117,51.5 120.5,51.5 122.5,49.5 129.5,49.5 129.5,26.5 125,26.5 120.5,22 120.5,14 120,13.5 114.2,13.5 111.575,16.125 56.5,16.125 56.5,0.5 34,0.5 34,9.3 26,9.3 26,55 56.5,55 56.5,72.5 81.5,72.5 85.5,76.5 85.5,99.5
GND_FS on Top Layer "GND_FS_L01_P006" (solid, remove dead copper, pour order 6): 56.5,89.5 56.5,76 69.5,76 72.5,79 72.5,84 78,84 78,89.5
GND_BUS on Top Layer "GND_BUS_L01_P001" (solid, remove dead copper, pour order 1): 75.475,0.515 75.475,11.815 76.375,12.715 102.475,12.715 103.275,11.915 103.275,6.415 103.775,5.915 105.675,5.915 106.175,5.415 106.175,0.515
GND_HW on Top Layer "GND_HW_L01_P008" (solid, remove dead copper, pour order 8): 0.5,68 7.1,68 7.1,52 2.8,52 2.8,47 23.2,47 23.2,9 17.5,9 15.7,7.2 15.7,4.5 10,4.5 10,10 0.5,10
AGND_HW on Top Layer "AGND_HW_L01_P010" (solid, remove dead copper, pour order 10): 2.8,49.4 2.8,48.1 19.1,48.1 20,49 20,68 8,68 8,59 8,51.5 2.8,51.5
AGND on Bottom Layer "AGND_L02_P000" (solid, remove dead copper, pour order 0): 0.5,80 7.5,80 10,82.5 10,99.5 43.2,99.5 43.2,72.5 53.5,62.2 57.7,62.2 65.4,54.5 63.9,54.5 61,54.5 57,58.5 53.5,58.5 53.5,56 26,56 26,68.5 23.5,71 0.5,71
GND_FS on Bottom Layer "GND_FS_L02_P005" (solid, remove dead copper, pour order 5): 56.5,89.5 56.5,76 69.5,76 72.5,79 72.5,84 76.025,84 76.025,89.5
GND on Bottom Layer "GND_L02_P002" (solid, remove dead copper, pour order 2): 120,89.5 120,82.5 122.5,80 129.5,80 129.5,66.5 119,66.5 117,64.5 117,51.5 120.5,51.5 124.5,47.5 129.5,47.5 129.5,26.5 125,26.5 120.5,22 120.5,17.8 120.5,14 120,13.5 118.1,13.5 113.4,13.5 110.775,16.125 60.375,16.125 54.25,10 26,10 26,55 56.5,55 56.5,72.5 81.5,72.5 85.5,76.5 85.5,89.5
GND_BUS on Bottom Layer "GND_BUS_L02_P004" (solid, remove dead copper, pour order 4): 75.475,0.515 75.475,11.815 76.375,12.715 102.475,12.715 103.275,11.915 103.275,6.415 103.775,5.915 105.675,5.915 106.175,5.415 106.175,0.515
GND_HW on Bottom Layer "GND_HW_L02_P011" (solid, remove dead copper, pour order 11): 0.5,68 7.5,68 7.5,52 2.8,52 2.8,47 23.2,47 23.2,9 17.5,9 15.7,7.2 15.7,4.5 10,4.5 10,10 0.5,10
AGND_HW on Bottom Layer "AGND_HW_L02_P009" (solid, remove dead copper, pour order 9): 2.8,49.4 2.8,48.1 19.1,48.1 20,49 20,68 8,68 8,51.5 2.8,51.5

## Silkscreen, mask and mechanical layers (free items; w line width, h text height)
Top Overlay:
  drawing of 22 lines, arcs and shapes, not listed
  text "Multi-module laser / Control board / Rev.0" at 37.625,28.25 h3
Top Assy:
  circle w0.2: c125,5 r1.6
  circle w0.2: c125,95 r1.6
  circle w0.2: c5,95 r1.6
  circle w0.2: c5,5 r1.6
Bottom Assy:
  circle w0.2: c125,95 r1.6
  circle w0.2: c125,5 r1.6
  circle w0.2: c5,95 r1.6
  circle w0.2: c5,5 r1.6
Board Outline:
  the board outline again, w0.15